# Altium PCB LCDTestor_CPLD.PcbDoc (part 1 of 2)
Units mil, origin at the board's own origin, x right, y up, seen from the top; angles counter-clockwise.
Board outline 5780 x 4745 mil, 2 copper layers (Top Layer, Bottom Layer); 142 components, 172 nets, 608 pads, 189 vias.
Unrouted connection lines stored in the file: 2.
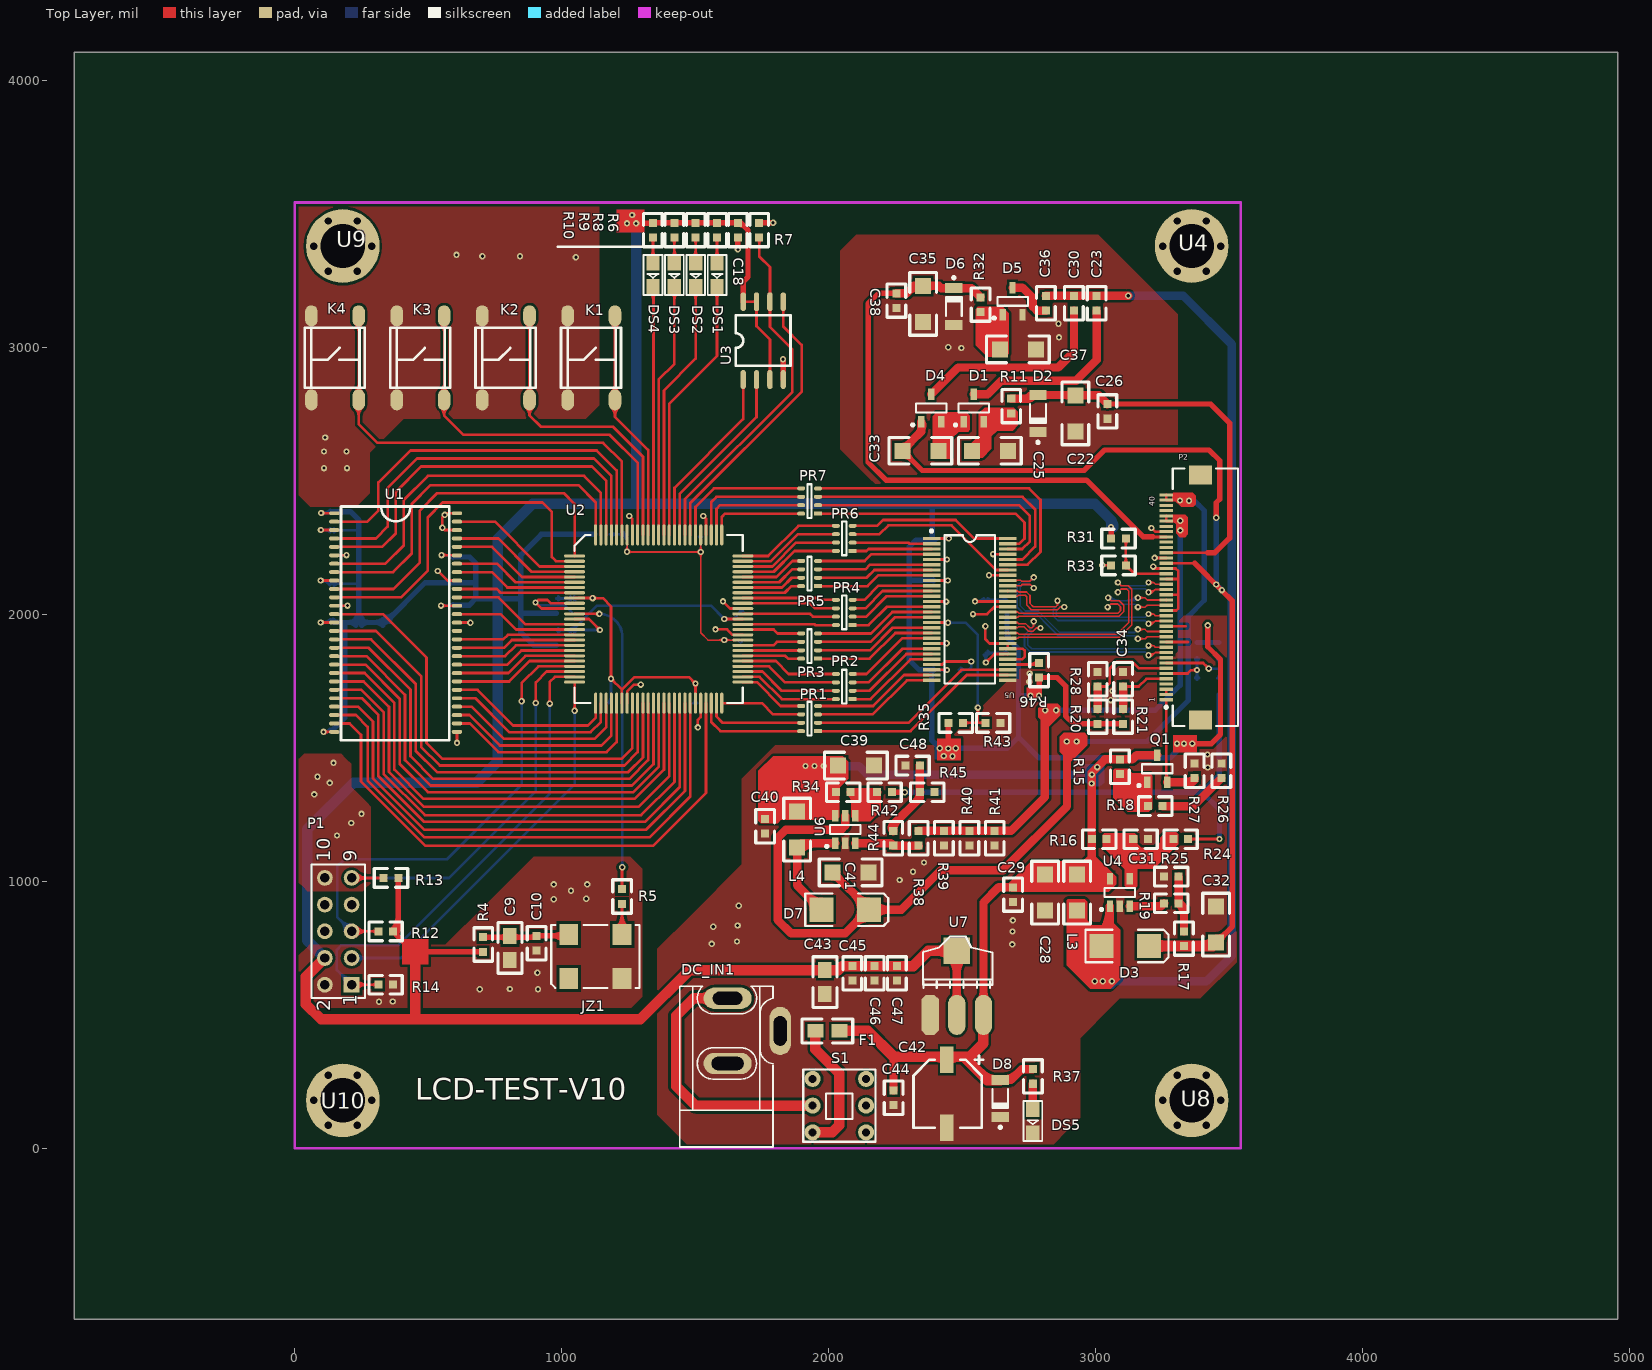
[diagram p0: Top Layer view]
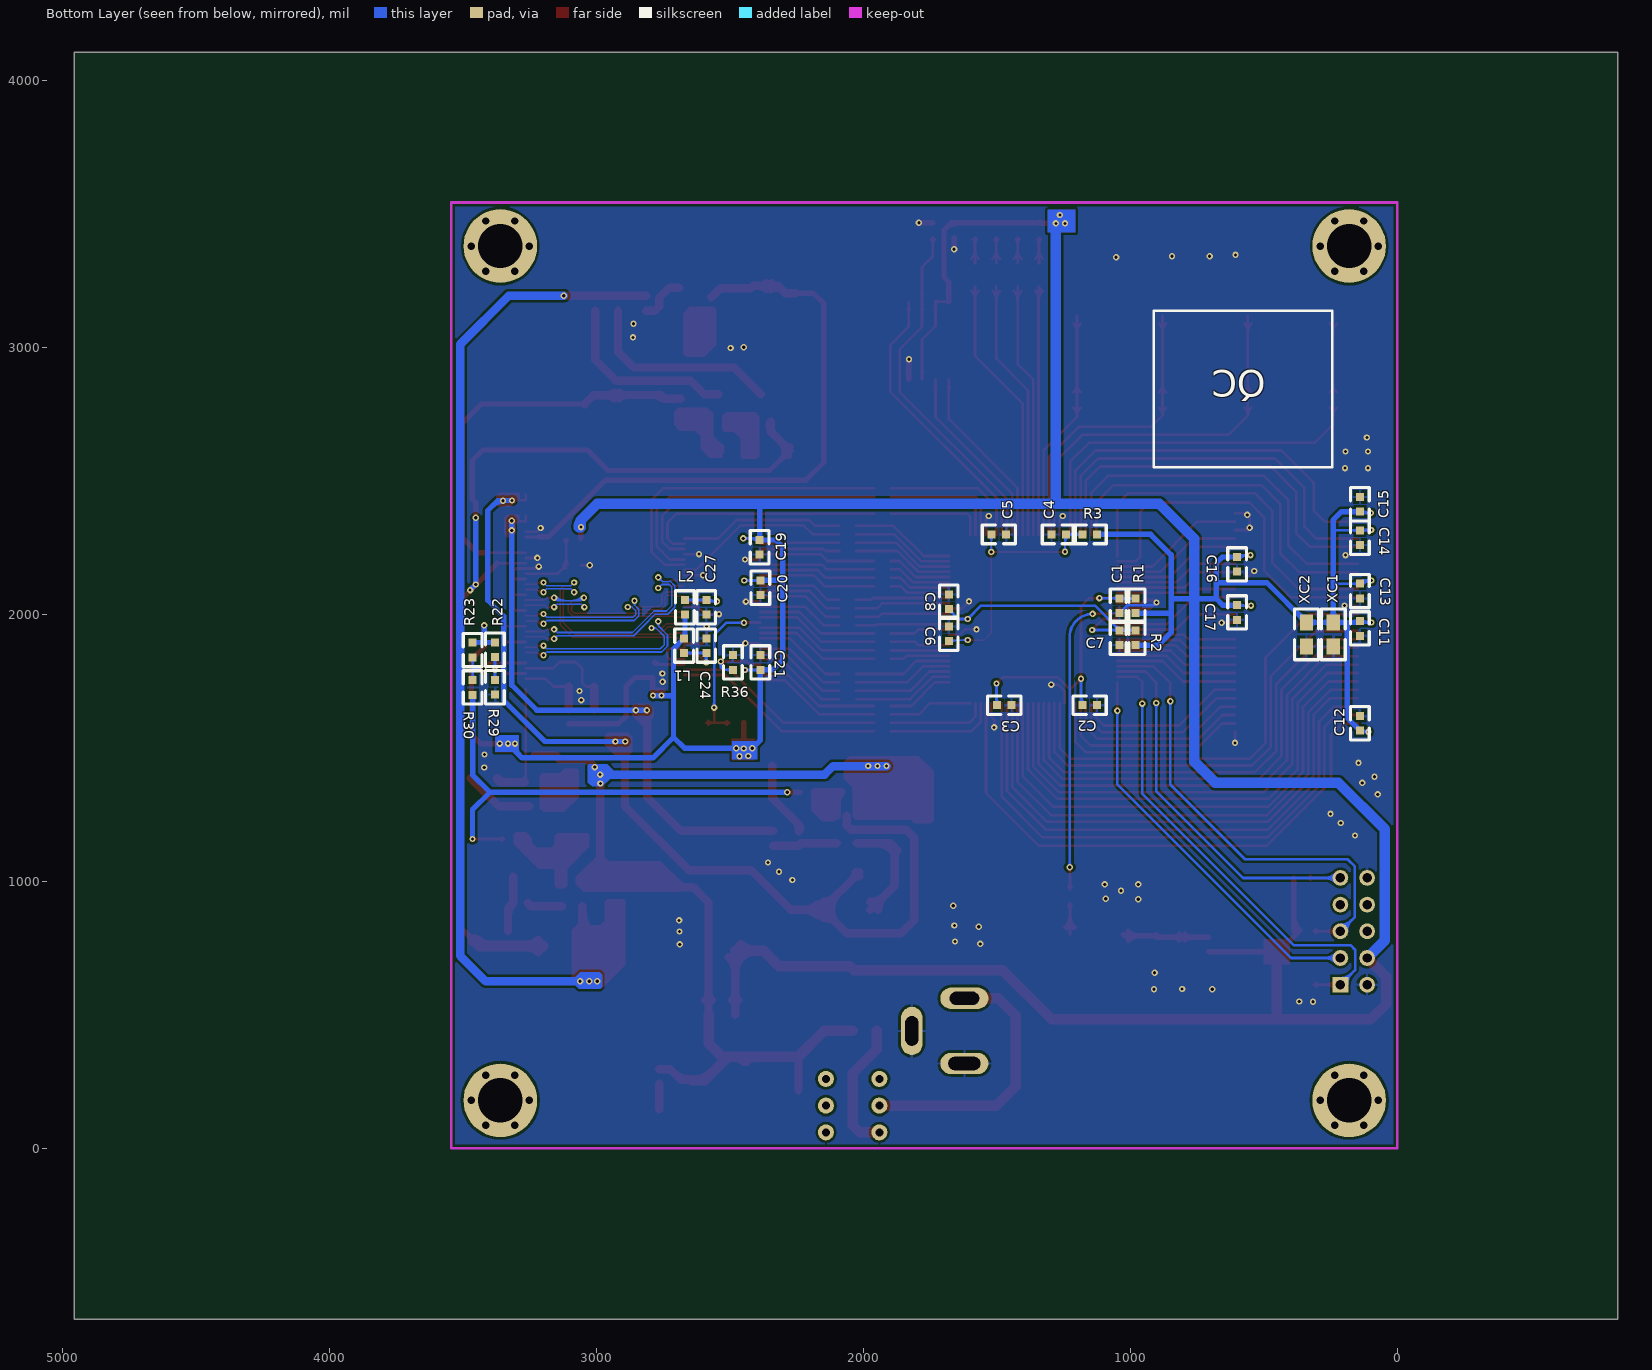
[diagram p1: Bottom Layer view, seen from below]

## Layer stack, top to bottom
Top Layer: signal copper 1.4
Dielectric: dielectric 12.6, FR-4, Dk 4.8
Bottom Layer: signal copper 1.4

## Board outline
-825,4105 -825,-640 1225,-640 4955,-640 4955,960 4955,4105 -825,4105

## Design rules (kind name [scope] priority, off if disabled: settings)
Clearance [All] p1: gap=10
DiffPairsRouting [All] p1: maxlimit=10 minlimit=5.91 mostfreqgap=5.91 maxuncoupledlength=500
PlaneConnect [All] p1: planeconnectstyle=Direct reliefexpansion=20 reliefentries=4 reliefconductorwidth=10 reliefairgap=10
PolygonConnect [All] p1: connectstyle=Direct reliefconductorwidth=10 reliefentries=4 polygonreliefangle="90 Angle"
RoutingVias [All] p1: holewidth=11.81 width=23.62 viastyle="Through Hole" minholewidth=11.81 minwidth=23.62 maxholewidth=28 maxwidth=50
SilkscreenOverComponentPads [All] p1: minsilkscreentomaskgap=10
SolderMaskExpansion [All] p1: expansion=4
Width [All] p1: maxlimit=39.37 minlimit=5.91 preferedwidth=10
25 further rules are at their usual default settings.

## Classes and differential pairs
differential pair RXIN3: +RXIN3_P -RXIN3_N
differential pair RXIN2: +RXIN2_P -RXIN2_N
differential pair RXIN1: +RXIN1_P -RXIN1_N
differential pair RXIN0: +RXIN0_P -RXIN0_N
differential pair RXCLKIN: +RXCLKIN_P -RXCLKIN_N

## Components (designator, comment, footprint, x,y, rotation, side; value= is the part's Value field where it differs from the comment)
C1 "104" 0603 1040,2060 r0 bottom
C2 "104" 0603 1180,1660 r270 bottom
C3 "104" 0603 1500,1660 r270 bottom
C4 "104" 0603 1240,2300 r90 bottom
C5 "104" 0603 1520,2300 r270 bottom
C6 "104" 0603 1680,1900 r180 bottom
C7 "104" 0603 1040,1940 r0 bottom
C8 "104" 0603 1680,2020 r180 bottom
C9 "4.7uF" 0805 806,796 r180 top
C10 "104" 0603 906,796 r180 top
C11 "103" 0603 140,1920 r180 bottom
C12 "103" 0603 140,1620 r0 bottom
C13 "103" 0603 140,2060 r180 bottom
C14 "103" 0603 140,2260 r180 bottom
C15 "103" 0603 140,2440 r0 bottom
C16 "103" 0603 600,2160 r180 bottom
C17 "103" 0603 600,1980 r180 bottom
C18 "103" 0603 1660,3412 r0 top
C19 "104" 0603 2388.39,2279 r0 bottom
C20 "104" 0603 2385.67,2127.27 r0 bottom
C21 "104" 0603 2385.67,1792.62 r180 bottom
C22 "10uF/25V" 1206 2924,2753 r180 top
C23 "104" 0603 3004,3193 r180 top
C24 "104" 0603 2588.39,1855.73 r180 bottom
C25 "10uF/25V" 1206 2604,2613 r270 top
C26 "104" 0603 3044,2733 r0 top
C27 "104" 0603 2588.39,2054 r0 bottom
C28 "10uF/25V" 1206 2811,958 r180 top
C29 "104" 0603 2691,978 r180 top
C30 "104" 0603 2919,3138 r0 top
C31 "104" 0603 3141,1158 r270 top
C32 "2.2uF/25V" 1206 3451,838 r0 top
C33 "10uF/25V" 1206 2344,2613 r90 top
C34 "104" 0603 3103,1730 r0 top
C35 "10uF/25V" 1206 2354,3163 r0 top
C36 "104" 0603 2814,3138 r0 top
C37 "10uF/25V" 1206 2709,2993 r90 top
C38 "104" 0603 2254,3203 r180 top
C39 "10uF/25V" 1206 2102,1434 r270 top
C40 "104" 0603 1762,1234 r180 top
C41 "2.2uF/25V" 1206 2082,1034 r270 top
C42 "Cap Tantalum" SMD06 2443,77 r0 top
C43 "Cap Tantalum" 0805 1986,578 r0 top
C44 "22uF" 0603 2243,217 r180 top
C45 "22uF" 0603 2088.5,683 r180 top
C46 "104" 0603 2172.25,683 r180 top
C47 "104" 0603 2256,683 r180 top
C48 "104" 0603 2342,1434 r90 top
D1 "BAV99" SOT-23-3L 2544,2773 r0 top
D2 "ZMM18" LL-34 2784,2753 r180 top
D3 "MBR0520" DSO-C2/X2.3 3111,758 r0 top
D4 "BAV99" SOT-23-3L 2384,2773 r0 top
D5 "BAV99" SOT-23-3L 2689,3173 r0 top
D6 "ZMM10" LL-34 2469,3153 r0 top
D7 "MBR0520" DSO-C2/X2.3 2062,894 r0 top
D8 "ZMM5V1" LL-34 2643,187 r180 top
DC_IN1 "POWER" DC10B 1720,440 r90 top locked
DS1 "LED1" SMDLED 1582,3272 r0 top
DS2 "LED1" SMDLED 1502,3272 r0 top
DS3 "LED1" SMDLED 1422,3272 r0 top
DS4 "LED1" SMDLED 1342,3272 r0 top
DS5 "LED1" SMDLED 2765,102 r0 top
F1 "Fuse 1" 0805 2040,440 r90 top
JZ1 "50MHz" Q5*7 1026,636 r0 top
K1 "KEY_M" K贴片 1111,2961 r0 top
K2 "KEY_M" K贴片 791,2961 r0 top
K3 "KEY_M" K贴片 471,2961 r0 top
K4 "KEY_M" K贴片 151,2961 r0 top
L1 "Inductor" 0603 2671.1,1910.73 r0 bottom
L2 "Inductor" 0603 2668.39,1999 r180 bottom
L3 "Inductor" 1206 2931,958 r180 top
L4 "Inductor" 1206 1882,1194 r180 top
P1 "Header 5X2" HDR2X5 213,613 r90 top
P2 "MHDR2X20" FH12A-40S-0.5SH 3328.39,2064 r90 top locked (schematic designator P1)
PR1 "20R" 0603_4 1958.39,1564 r90 top
PR2 "20R" 0603_4 2088.39,1684 r90 top
PR3 "20R" 0603_4 1958.39,1835.67 r90 top
PR4 "20R" 0603_4 2088.39,1961.5 r90 top
PR5 "20R" 0603_4 1958.39,2107.33 r90 top
PR6 "20R" 0603_4 2088.39,2239 r90 top
PR7 "20R" 0603_4 1958.39,2379 r90 top
Q1 "2N3904" SOT-23-3L 3231,1422 r0 top
R1 "0" 0603 980,2060 r0 bottom
R2 "0" 0603 980,1940 r0 bottom
R3 "0" 0603 1180,2300 r270 bottom
R4 "20" 0603 706,736 r0 top
R5 "20" 0603 1226,916 r0 top
R6 "510" 0603 1582,3412 r0 top
R7 "10K" 0603 1740,3412 r0 top
R8 "510" 0603 1502,3412 r0 top
R9 "510" 0603 1422,3412 r0 top
R10 "510" 0603 1342,3412 r0 top
R11 "1.5K" 0603 2684,2753 r0 top
R12 "10K" 0603 313,813 r270 top
R13 "10K" 0603 333,1013 r270 top
R14 "10K" 0603 313,613 r270 top
R15 "10K" 0603 3091,1402 r0 top
R16 "10K" 0603 3041,1158 r90 top
R17 "100K  %1" 0603 3331,758 r0 top
R18 "10K" 0603 3251,1282 r90 top
R19 "100K" 0603 3311,918 r90 top
R20 "10K" 0603 3008,1590 r0 top
R21 "10K" 0603 3103,1645 r180 top
R22 "10K" 0603 3380,1840 r180 bottom
R23 "10K" 0603 3463.39,1894 r0 bottom
R24 "0" 0603 3291,1158 r270 top
R25 "12.4K  %1" 0603 3311,1018 r90 top
R26 "10K" 0603 3471,1442 r180 top
R27 "10K" 0603 3371,1442 r180 top
R28 "10K" 0603 3008,1785 r180 top
R29 "10K" 0603 3380,1700 r180 bottom
R30 "0" 0603 3463.39,1754 r0 bottom
R31 "10K" 0603 3113.39,2284 r90 top
R32 "270R" 0603 2569,3133 r0 top
R33 "10K" 0603 3058.39,2184 r270 top
R34 "10K" 0603 2082,1334 r90 top
R35 "10K" 0603 2503.39,1594 r90 top
R36 "20" 0603 2488.39,1792.62 r180 bottom
R37 "1K" 0603 2765,242 r0 top
R38 "10K" 0603 2337,1189 r180 top
R39 "1.1" 0603 2432,1134 r0 top
R40 "1.2" 0603 2527,1134 r0 top
R41 "1.1" 0603 2622,1134 r0 top
R42 "0" 0603 2182,1334 r270 top
R43 "10K" 0603 2643.39,1594 r90 top
R44 "3K" 0603 2242,1134 r0 top
R45 "82K" 0603 2342,1334 r270 top
R46 "4.8K" 0603 2788.39,1819 r180 top
S1 "SW-SPDT" 自锁开关6 2040,160 r270 top locked
U1 "MT48LC16M16A2P" TSSOP54 148.39,2379 r0 top
U2 "EPM240T100I5N" TQFP-100 1048.39,2219 r0 top (schematic designator IC9)
U3 "W25Q32BVIG" 8S2 1680,2880 r90 top (schematic designator IC13)
U4 "Comment" 螺丝孔-4mm 3360,3380 r0 top locked
U4 "MP1541DJ" SOT-23-5L 3091,958 r0 top
U5 "SN75LVDS83B" DGG056 2528.39,2019 r270 top (schematic designator U3)
U6 "MP3202DJ" SOT-23-6L 2062,1194 r0 top
U7 "AMS1117-3.3" AMS1117 2480,620 r0 top
U8 "Comment" 螺丝孔-4mm 3360,180 r0 top locked
U9 "Comment" 螺丝孔-4mm 180,3380 r0 top locked
U10 "Comment" 螺丝孔-4mm 180,180 r0 top locked
XC1 "4.7uF" 0805 240,1880 r180 bottom
XC2 "4.7uF" 0805 340,1880 r180 bottom

## Footprints (in the part's own frame and the unit in brackets; to place one, negate y for a bottom-side part, rotate by r counter-clockwise, add the part's x,y. Pads: shape width x height; smd on the part's side, far side on the other; paste and mask are expansions set on the pad)
8S2 [mm] "AT26DF321"
  oval 1.8x0.508 smd: 1(0,0) 2(0,-1.27) 3(0,-2.54) 4(0,-3.81) 5(7.4,-3.81) 6(7.4,-2.54) 7(7.4,-1.27) 8(7.4,0)
  silkscreen extent 1.3,-4.5 6.1,0.7
0603 [mil]
  rect 30x30 smd: 1(0,55) 2(0,0)
  silkscreen extent -35,-35 35,90
0603_4 [mil]
  rect 15x30 smd: 1(-1.42,-1.73)
  oval 15x30 smd: 2(30.08,-1.73) 3(61.57,-1.73) 4(93.07,-1.73) 5(93.07,61.14) 6(61.57,61.14) 7(30.08,61.14) 8(-1.42,61.26)
  silkscreen extent -17,22 109,38
0805 [mil]
  rect 50x60 smd: 1(0,90) 2(0,0)
  silkscreen extent -45,-50 45,140
1206 [mil]
  rect 60x60 smd: 1(0,-67.5) 2(0,67.5)
  silkscreen extent -50,-118 50,118
AMS1117 [mil] "U?"
  oct 65x150 smd: 1(-100,-120)
  oval 65x150 smd: 2(0,-120) 3(100,-120)
  rect 100x100 smd: 4(0,120)
  silkscreen extent -126,-20 134,173
DC10B [mil] "J?"
  oval 80x180 hole 50 slot 110 at 90 deg: 1(122.05,98.43)
  oval 80x180 hole 50 slot 120 at 90 deg: 2(-122.05,98.43)
  oval 180x80 hole 50 slot 110 at 0 deg: 3(0,-98.43)
  silkscreen extent -435,-72 168,278
DGG056 [mm] "Shrink Small Outline; 56 Leads; Body Width 6.1 mm; Pitch 0.5 mm"
  rect 0.3x1.65 smd: 1(-6.75,-3.625) 2(-6.25,-3.625) 3(-5.75,-3.625) 4(-5.25,-3.625) 5(-4.75,-3.625) 6(-4.25,-3.625) 7(-3.75,-3.625) 8(-3.25,-3.625) 9(-2.75,-3.625) 10(-2.25,-3.625) 11(-1.75,-3.625) 12(-1.25,-3.625) 13(-0.75,-3.625) 14(-0.25,-3.625) 15(0.25,-3.625) 16(0.75,-3.625) 17(1.25,-3.625) 18(1.75,-3.625) 19(2.25,-3.625) 20(2.75,-3.625) 21(3.25,-3.625) 22(3.75,-3.625) 23(4.25,-3.625) 24(4.75,-3.625) 25(5.25,-3.625) 26(5.75,-3.625) 27(6.25,-3.625) 28(6.75,-3.625) 29(6.75,3.625) 30(6.25,3.625) 31(5.75,3.625) 32(5.25,3.625) 33(4.75,3.625) 34(4.25,3.625) 35(3.75,3.625) 36(3.25,3.625) 37(2.75,3.625) 38(2.25,3.625) 39(1.75,3.625) 40(1.25,3.625) 41(0.75,3.625) 42(0.25,3.625) 43(-0.25,3.625) 44(-0.75,3.625) 45(-1.25,3.625) 46(-1.75,3.625) 47(-2.25,3.625) 48(-2.75,3.625) 49(-3.25,3.625) 50(-3.75,3.625) 51(-4.25,3.625) 52(-4.75,3.625) 53(-5.25,3.625) 54(-5.75,3.625) 55(-6.25,3.625) 56(-6.75,3.625)
  silkscreen extent -7.57,-3.75 7.05,2.4
DSO-C2/X2.3 [mm] "DO-214-AA/SMB; 2 C-Bend Leads; Body 5.3 x 3.6 mm, inc. leads (LxW)"
  rect 2.3x2.3 smd: 1(-2.25,0) 2(2.25,0)
  silkscreen extent -3.8,-1.55 4.1,1.55
FH12A-40S-0.5SH [mm] "Connector; FH12 Series; 40 Position; 0.5mm Spaced Top Contact"
  rect 0.3x1.3 smd: 1(-9.75,1.625) 2(-9.25,1.625) 3(-8.75,1.625) 4(-8.25,1.625) 5(-7.75,1.625) 6(-7.25,1.625) 7(-6.75,1.625) 8(-6.25,1.625) 9(-5.75,1.625) 10(-5.25,1.625) 11(-4.75,1.625) 12(-4.25,1.625) 13(-3.75,1.625) 14(-3.25,1.625) 15(-2.75,1.625) 16(-2.25,1.625) 17(-1.75,1.625) 18(-1.25,1.625) 19(-0.75,1.625) 20(-0.25,1.625) 21(0.25,1.625) 22(0.75,1.625) 23(1.25,1.625) 24(1.75,1.625) 25(2.25,1.625) 26(2.75,1.625) 27(3.25,1.625) 28(3.75,1.625) 29(4.25,1.625) 30(4.75,1.625) 31(5.25,1.625) 32(5.75,1.625) 33(6.25,1.625) 34(6.75,1.625) 35(7.25,1.625) 36(7.75,1.625) 37(8.25,1.625) 38(8.75,1.625) 39(9.25,1.625) 40(9.75,1.625)
  rect 1.8x2.2 smd: 41(-11.65,-1.625) 42(11.65,-1.625)
  silkscreen extent -12.25,-5.2 12.25,1.75
HDR2X5 [mm] "Connector; Header; 5x2 Position"
  rect 1.5x1.5 hole 0.9: 1(0,0)
  round 1.5 hole 0.9: 2(0,2.54) 3(2.54,0) 4(2.54,2.54) 5(5.08,0) 6(5.08,2.54) 7(7.62,0) 8(7.62,2.54) 9(10.16,0) 10(10.16,2.54)
  silkscreen extent -1.27,-1.27 11.43,3.81
K贴片 [mm] "S?"
  oval 1.2x2 smd: 1(-2.25,-4) 1(-2.25,4) 2(2.25,-4) 2(2.25,4)
  silkscreen extent -2.89,-2.86 2.83,2.86
LL-34 [mm] "D?"
  rect 1.65x0.95 smd: 1(0,1.75) 2(0,-1.75)
  silkscreen extent -0.75,-0.9 0.75,2.87
Q5*7 [mil] "25MHZ"
  rect 70x80 smd: 1(0,0) 2(200,0) 3(200,165) 4(0,165)
  silkscreen extent -65,-35 265,200
SMD06 [mil]
  rect 50x100 smd: 1(0,255) 2(0,0)
  silkscreen extent -125,0 135,270
SMDLED [mm] "D?"
  rect 1.27x1.4 smd: 1(0,1.105) 2(0,-1.105)
  silkscreen extent -0.89,-1.91 0.89,1.91
SOT-23-3L [mm] "D?"
  rect 0.6x1.1 smd: 1(-0.95,-1.3) 2(0.95,-1.3) 3(0,1.3)
  silkscreen extent -1.87,-1.72 1.45,0.43
SOT-23-5L [mm] "U?"
  rect 0.6x1.1 smd: 1(-0.95,-1.3) 2(0,-1.3) 3(0.95,-1.3) 4(0.95,1.3) 5(-0.95,1.3)
  silkscreen extent -1.87,-1.72 1.45,0.43
SOT-23-6L [mm] "U?"
  rect 0.6x1.1 smd: 1(-0.95,-1.3) 2(0,-1.3) 3(0.95,-1.3) 4(0.95,1.3) 5(0,1.3) 6(-0.95,1.3)
  silkscreen extent -1.87,-1.72 1.45,0.43
TQFP-100 [mm]
  oval 2x0.29 smd: 1(0,0) 2(0,-0.5) 3(0,-1) 4(0,-1.5) 5(0,-2) 6(0,-2.5) 7(0,-3) 8(0,-3.5) 9(0,-4) 10(0,-4.5) 11(0,-5) 12(0,-5.5) 13(0,-6) 14(0,-6.5) 15(0,-7) 16(0,-7.5) 17(0,-8) 18(0,-8.5) 19(0,-9) 20(0,-9.5) 21(0,-10) 22(0,-10.5) 23(0,-11) 24(0,-11.5) 25(0,-12) 51(16,-12) 52(16,-11.5) 53(16,-11) 54(16,-10.5) 55(16,-10) 56(16,-9.5) 57(16,-9) 58(16,-8.5) 59(16,-8) 60(16,-7.5) 61(16,-7) 62(16,-6.5) 63(16,-6) 64(16,-5.5) 65(16,-5) 66(16,-4.5) 67(16,-4) 68(16,-3.5) 69(16,-3) 70(16,-2.5) 71(16,-2) 72(16,-1.5) 73(16,-1) 74(16,-0.5) 75(16,0)
  oval 0.29x2 smd: 26(2,-14) 27(2.5,-14) 28(3,-14) 29(3.5,-14) 30(4,-14) 31(4.5,-14) 32(5,-14) 33(5.5,-14) 34(6,-14) 35(6.5,-14) 36(7,-14) 37(7.5,-14) 38(8,-14) 39(8.5,-14) 40(9,-14) 41(9.5,-14) 42(10,-14) 43(10.5,-14) 44(11,-14) 45(11.5,-14) 46(12,-14) 47(12.5,-14) 48(13,-14) 49(13.5,-14) 50(14,-14) 76(14,2) 77(13.5,2) 78(13,2) 79(12.5,2) 80(12,2) 81(11.5,2) 82(11,2) 83(10.5,2) 84(10,2) 85(9.5,2) 86(9,2) 87(8.5,2) 88(8,2) 89(7.5,2) 90(7,2) 91(6.5,2) 92(6,2) 93(5.5,2) 94(5,2) 95(4.5,2) 96(4,2) 97(3.5,2) 98(3,2) 99(2.5,2) 100(2,2)
  silkscreen extent 0,-14 16,2
TSSOP54 [mm] "U?"
  oval 1x0.375 smd: 1(0,0) 2(0,-0.8) 3(0,-1.6) 4(0,-2.4) 5(0,-3.2) 6(0,-4) 7(0,-4.8) 8(0,-5.6) 9(0,-6.4) 10(0,-7.2) 11(0,-8) 12(0,-8.8) 13(0,-9.6) 14(0,-10.4) 15(0,-11.2) 16(0,-12) 17(0,-12.8) 18(0,-13.6) 19(0,-14.4) 20(0,-15.2) 21(0,-16) 22(0,-16.8) 23(0,-17.6) 24(0,-18.4) 25(0,-19.2) 26(0,-20) 27(0,-20.8) 28(11.67,-20.8) 29(11.67,-20) 30(11.67,-19.2) 31(11.67,-18.4) 32(11.67,-17.6) 33(11.67,-16.8) 34(11.67,-16) 35(11.67,-15.2) 36(11.67,-14.4) 37(11.67,-13.6) 38(11.67,-12.8) 39(11.67,-12) 40(11.67,-11.2) 41(11.67,-10.4) 42(11.67,-9.6) 43(11.67,-8.8) 44(11.67,-8) 45(11.67,-7.2) 46(11.67,-6.4) 47(11.67,-5.6) 48(11.67,-4.8) 49(11.67,-4) 50(11.67,-3.2) 51(11.67,-2.4) 52(11.67,-1.6) 53(11.67,-0.8) 54(11.67,0)
  silkscreen extent 0.64,-21.59 10.92,0.64
自锁开关6 [mil] "J?"
  round 60 hole 30: 1(-100,-100) 2(0,-100) 3(100,-100) 4(100,100) 5(0,100) 6(-100,100)
  silkscreen extent -135,-135 135,135
螺丝孔-4mm [mm]
  round 7 hole 4.2: 1(0,0)

## Part data
C1 C2 C3 C4 C5 C6 C7 C8 C9 C10 C19 C20 C21 C22 C23 C24 C25 C26 C27 C28 C29 C30 C31 C32 C33 C34 C35 C36 C37 C38 C39 C40 C41 C48: library part C
C11 C12 C13 C14 C15 C16 C17 C18 XC1 XC2: library part CAP, "Capacitor"
C42 C43: "Polarized Capacitor (Surface Mount)"
C44 C45 C46 C47: library part C_2
D2 D6 D8: library part "D Zener", "Zener Diode"
D3 D7: library part "D Schottky", "Schottky Diode"
DC_IN1: library part POW
DS1 DS2 DS3 DS4 DS5: library part LED2, "Typical RED, GREEN, YELLOW, AMBER GaAs LED"
F1: "Fuse"
JZ1: library part JZ-4P, "4脚晶振"
P1: "Header, 5-Pin, Dual row"
P2: "Header, 20-Pin, Dual row"
PR1 PR2 PR3 PR4 PR5 PR6 PR7: library part PR-4
Q1: "NPN General Purpose Amplifier"
R1 R2 R3 R4 R5 R6 R7 R8 R9 R10 R11 R12 R13 R14 R15 R16 R17 R18 R19 R20 R21 R22 R23 R24 R25 R26 R27 R28 R29 R30 R31 R32 R33 R34 R35 R36 R37 R38 R39 R40 R41 R42 R43 R44 R45 R46: library part R
S1: "SPDT Subminiature Toggle Switch, Right Angle Mounting, Vertical Actuation"
U2: "MAX II 3.3/2.5V CPLD, 80 IOs, 240 Logic Elements, 100-Pin Plastic TQFP, Industrial Temperature, Speed Grade 5, Pb-Free"
U4: library part MP1541
U6: library part MP3202
U7: library part AMS1117

## Via types
v1: diameter 23.62, hole 11.81, Top Layer to Bottom Layer, 165 vias
v2: diameter 50, hole 28, Top Layer to Bottom Layer, 24 vias

## Nets (pads, with @x,y where several pads share a name; then routed paths per layer and width w, separated by ;. In a path a pad name is that pad's centre, name@x,y a point inside that pad or via, vN(x,y) a via of type N, cw(c..) or ccw(c..) an arc to the next point about the centre after c; other vN are vias at no path point)
AVDD: C32.1 C33.2 D3.2 D4.1 P2.27 R17.2 | length 4173.9
  Top Layer w10: P2.27@3264.41,2191.95 3370.95,2191.95
  Top Layer w20: C33.2@2276.5,2593 cw(c2276.5,2544.72) 2310.64,2578.86 cw(c2344.78,2613) C33.2@2296.5,2613 ; C33.2@2276.5,2613 2350.5,2539 2957,2539 3034,2616 3425,2616 3465,2576 3465,2432 3452,2419 v1(3452,2362) ; 3370.95,2191.95 v1@3472.45,2090.45 ; C32.1@3451,770.5 3512,831.5 3512,2050.9 v1@3472.45,2090.45 ; C32.1@3451,790.5 ccw(c3451,838.78) 3485.14,804.64 ccw(c3519.28,770.5) C32.1@3471,770.5 ; v1(3473,2091) v1@3472.45,2090.45
  Top Layer w31.5: C33.2@2276.5,2613 2276.5,2614.5 2346.6,2684.6 D4.1@2346.6,2721.82 ; C33.2@2276.5,2627.25 ccw(c2276.5,2658.04) C33.2@2298.27,2636.27 ; C33.2@2290.75,2613 cw(c2328.78,2613) C33.2@2301.89,2639.89 ; 2333.96,2671.96 ccw(c2293.94,2711.98) D4.1@2350.54,2711.98
  Top Layer w39.37: D3.2@3199.58,758 R17.2@3331,758 3438.5,758 C32.1@3451,770.5 ; D3.2@3217.68,739.9 cw(c3261.36,696.22) 3261.36,758 cw(c3261.36,819.78) D3.2@3217.68,776.1 ; 3395.92,758 ccw(c3395.92,825.58) C32.1@3443.71,777.79
  Bottom Layer w20: v1(3452,2362) v1(3452,2112) v1(3473,2091)
B0: PR3.5 U2.61 | length 225
  Top Layer w10: U2.61@1678.31,1943.41 1793.98,1943.41 1808.65,1928.74 PR3.5@1897.24,1928.74
B1: PR3.8 U2.56 | length 223.3
  Top Layer w10: U2.56@1678.31,1844.98 1837.4,1844.98 1848.14,1834.25 PR3.8@1897.13,1834.25
B2: PR2.5 U2.55 | length 368.9
  Top Layer w10: U2.55@1678.31,1825.3 1802.09,1825.3 1850.32,1777.07 PR2.5@2027.24,1777.07
B3: PR2.6 U2.54 | length 373.8
  Top Layer w10: U2.54@1678.31,1805.61 1776.77,1805.61 1836.81,1745.57 PR2.6@2027.24,1745.57
B4: PR2.7 U2.53 | length 378.7
  Top Layer w10: U2.53@1678.31,1785.93 1751.46,1785.93 1823.31,1714.08 PR2.7@2027.24,1714.08
B5: PR2.8 U2.52 | length 383.5
  Top Layer w10: U2.52@1678.31,1766.24 1741.14,1766.24 1824.8,1682.58 PR2.8@2027.13,1682.58
B6: PR3.6 U2.58 | length 224.3
  Top Layer w10: U2.58@1678.31,1884.35 1793.74,1884.35 1806.63,1897.24 PR3.6@1897.24,1897.24
B7: PR3.7 U2.57 | length 227
  Top Layer w10: U2.57@1678.31,1864.67 1896.17,1864.67 PR3.7@1897.24,1865.75 ; 1881.11,1864.67 ccw(c1881.11,1874.38) PR3.7@1887.98,1867.51
B_0: PR3.4 U5.15 | length 458.9
  Top Layer w10: PR3.4@1960.12,1928.74 2158.12,1928.74 2238.54,2009.16 U5.15@2385.67,2009.16
B_1: PR3.1 U5.19 | length 465.4
  Top Layer w10: PR3.1@1960.12,1834.25 2153.64,1834.25 2249.8,1930.42 U5.19@2385.67,1930.42
B_2: PR2.4 U5.20 | length 350.9
  Top Layer w10: PR2.4@2090.12,1777.07 2141.46,1777.07 2275.12,1910.73 U5.20@2385.67,1910.73
B_3: PR2.3 U5.22 | length 347.7
  Top Layer w10: PR2.3@2090.12,1745.57 2149.96,1745.57 2275.75,1871.36 U5.22@2385.67,1871.36
B_4: PR2.2 U5.23 | length 352.5
  Top Layer w10: PR2.2@2090.12,1714.08 2153.46,1714.08 2291.06,1851.68 U5.23@2385.67,1851.68
B_5: PR2.1 U5.24 | length 357.4
  Top Layer w10: PR2.1@2090.12,1682.58 2156.97,1682.58 2306.38,1831.99 U5.24@2385.67,1831.99
B_6: PR3.3 U5.16 | length 463.8
  Top Layer w10: PR3.3@1960.12,1897.24 2156.63,1897.24 2248.86,1989.47 U5.16@2385.67,1989.47
B_7: PR3.2 U5.18 | length 460.5
  Top Layer w10: PR3.2@1960.12,1865.75 2155.13,1865.75 2239.49,1950.1 U5.18@2385.67,1950.1
BL_DIM: R45.1
BL_EN: R24.1 R30.1 R42.1 | length 1937.8
  Top Layer w10: R24.1@3346,1158 3347,1159 v1(3464,1159) ; R24.1@3353.07,1150.93 cw(c3372.56,1131.44) 3372.56,1159 ; R24.1@3353.07,1165.07 ccw(c3367.73,1179.73) 3367.73,1159 ; v1@3459.18,1154.18 ccw(c3447.56,1142.56) 3447.56,1159 ccw(c3447.56,1175.44) v1@3459.18,1163.82
  Top Layer w20: R42.1@2237,1334 v1(2285,1334)
  Bottom Layer w20: v1(2285,1334) 3399,1334 ; R30.1@3463.39,1699 3463.39,1398.39 3399,1334 ; v1(3464,1159) 3464,1269 3399,1334
CLK: PR1.8 U2.48 | length 421.9
  Top Layer w10: U2.48@1560.2,1667.82 1560.2,1597.19 1594.8,1562.58 PR1.8@1897.13,1562.58
DM_A0: U1.23 U2.42 | length 1988.4
  Top Layer w10: U1.23@148.39,1686.09 251.3,1686.09 313.39,1624 313.39,1393.85 483.31,1223.93 1313.31,1223.93 1442.09,1352.7 U2.42@1442.09,1667.82
DM_A1: U1.24 U2.43 | length 2018.1
  Top Layer w10: U1.24@148.39,1654.59 237.8,1654.59 293.39,1599 293.39,1385.57 484.95,1194 1316.77,1194 1461.77,1339 U2.43@1461.77,1667.82
DM_A2: U1.25 U2.44 | length 2054.2
  Top Layer w10: U1.25@148.39,1623.09 229.29,1623.09 273.39,1579 273.39,1377.28 485.03,1165.64 1330.03,1165.64 1481.46,1317.07 U2.44@1481.46,1667.82
DM_A3: U1.26 U2.47 | length 2102.5
  Top Layer w10: U1.26@148.39,1591.6 205.79,1591.6 248.39,1549 248.39,1374 488.39,1134 1343.39,1134 1540.51,1331.13 U2.47@1540.51,1667.82
DM_A4: U1.29 U2.30 | length 804.5
  Top Layer w10: U1.29@607.83,1591.6 655.79,1591.6 763.39,1484 1168.39,1484 1205.87,1521.48 U2.30@1205.87,1667.82
DM_A5: U1.30 U2.29 | length 762.3
  Top Layer w10: U1.30@607.83,1623.09 654.29,1623.09 768.39,1509 1148.39,1509 1186.18,1546.8 U2.29@1186.18,1667.82
DM_A6: U1.31 U2.28 | length 717.2
  Top Layer w10: U1.31@607.83,1654.59 662.8,1654.59 783.39,1534 1123.39,1534 1166.5,1577.11 U2.28@1166.5,1667.82
DM_A7: U1.32 U2.27 | length 677.9
  Top Layer w10: U1.32@607.83,1686.09 676.3,1686.09 803.39,1559 1108.39,1559 1146.81,1597.43 U2.27@1146.81,1667.82
DM_A8: U1.33 U2.26 | length 641.6
  Top Layer w10: U1.33@607.83,1717.58 684.8,1717.58 818.39,1584 1098.39,1584 1127.13,1612.74 U2.26@1127.13,1667.82
DM_A9: U1.34 U2.21 | length 472.1
  Top Layer w10: U1.34@607.83,1749.08 803.46,1749.08 879.68,1825.3 U2.21@1048.39,1825.3
DM_A10: U1.22 U2.41 | length 1950.9
  Top Layer w10: U1.22@148.39,1717.58 249.8,1717.58 333.39,1634 333.39,1402.14 487.45,1248.07 1297.45,1248.07 1422.4,1373.02 U2.41@1422.4,1667.82
DM_A11: U1.35 U2.20 | length 467.2
  Top Layer w10: U1.35@607.83,1780.57 799.96,1780.57 864.37,1844.98 U2.20@1048.39,1844.98
DM_A12: U1.36 U2.19 | length 462.3
  Top Layer w10: U1.36@607.83,1812.07 796.46,1812.07 849.06,1864.67 U2.19@1048.39,1864.67
DM_BA0: U1.20 U2.39 | length 1871.2
  Top Layer w10: U1.20@148.39,1780.57 261.81,1780.57 373.39,1669 373.39,1418.71 483.09,1309 1273.39,1309 1383.03,1418.65 U2.39@1383.03,1667.82
DM_BA1: U1.21 U2.40 | length 1913.6
  Top Layer w10: U1.21@148.39,1749.08 258.31,1749.08 353.39,1654 353.39,1410.42 484.81,1279 1288.39,1279 1402.72,1393.33 U2.40@1402.72,1667.82
DM_CAS: U1.17 U2.36 | length 1768.3
  Top Layer w10: U1.17@148.39,1875.06 277.32,1875.06 433.39,1719 433.39,1469 518.39,1384 1253.98,1384 1323.98,1454 U2.36@1323.98,1667.82
DM_CKE: U1.37 U2.18 | length 457.4
  Top Layer w10: U1.37@607.83,1843.57 787.95,1843.57 828.74,1884.35 U2.18@1048.39,1884.35
DM_CLK: U1.38 U2.17 | length 452.6
  Top Layer w10: U1.38@607.83,1875.06 784.45,1875.06 813.43,1904.04 U2.17@1048.39,1904.04
DM_CS: U1.19 U2.38 | length 1834.7
  Top Layer w10: U1.19@148.39,1812.07 265.32,1812.07 393.39,1684 393.39,1439 498.39,1334 1268.39,1334 1363.35,1428.96 U2.38@1363.35,1667.82
DM_D0: U1.2 U2.96 | length 1501.7
  Top Layer w10: U1.2@148.39,2347.5 271.89,2347.5 313.39,2389 313.39,2494 433.39,2614 1130.87,2614 1205.87,2539 U2.96@1205.87,2297.74
DM_D1: U1.4 U2.97 | length 1495
  Top Layer w10: U1.4@148.39,2284.51 303.9,2284.51 348.39,2329 348.39,2474 458.39,2584 1121.18,2584 1186.18,2519 U2.97@1186.18,2297.74
DM_D2: U1.5 U2.98 | length 1458.7
  Top Layer w10: U1.5@148.39,2253.02 327.4,2253.02 378.39,2304 378.39,2459 473.39,2554 1113.39,2554 1166.5,2500.89 U2.98@1166.5,2297.74
DM_D3: U1.7 U2.99 | length 1418.4
  Top Layer w10: U1.7@148.39,2190.02 339.41,2190.02 408.39,2259 408.39,2429 498.39,2519 1083.39,2519 1146.81,2455.57 U2.99@1146.81,2297.74
DM_D4: U1.8 U2.100 | length 1370.8
  Top Layer w10: U1.8@148.39,2158.53 367.91,2158.53 438.39,2229 438.39,2414 508.39,2484 1063.39,2484 1127.13,2420.26 U2.100@1127.13,2297.74
DM_D5: U1.10 U2.1 | length 1374.3
  Top Layer w10: U1.10@148.39,2095.54 369.92,2095.54 468.39,2194 468.39,2389 533.39,2454 1008.39,2454 1048.39,2414 1048.39,2389 U2.1@1048.39,2219
DM_D6: U1.11 U2.2 | length 1354.6
  Top Layer w10: U1.11@148.39,2064.04 398.43,2064.04 498.39,2164 498.39,2364 553.39,2419 928.39,2419 963.39,2384 963.39,2214.32 978.39,2199.32 U2.2@1048.39,2199.32
DM_D7: U1.13 U2.33 | length 1713.9
  Top Layer w10: U1.13@148.39,2001.05 331.34,2001.05 493.39,1839 493.39,1519 553.39,1459 1224.92,1459 1264.92,1499 U2.33@1264.92,1667.82
DM_D8: U1.42 U2.15 | length 464.4
  Top Layer w10: U1.42@607.83,2001.05 771.34,2001.05 828.98,1943.41 U2.15@1048.39,1943.41
DM_D9: U1.44 U2.14 | length 482.4
  Top Layer w10: U1.44@607.83,2064.04 763.35,2064.04 864.29,1963.09 U2.14@1048.39,1963.09
DM_D10: U1.45 U2.8 | length 446.5
  Top Layer w10: U1.45@607.83,2095.54 756.85,2095.54 771.18,2081.2 U2.8@1048.39,2081.2
DM_D11: U1.47 U2.7 | length 464.4
  Top Layer w10: U1.47@607.83,2158.53 738.86,2158.53 796.5,2100.89 U2.7@1048.39,2100.89
DM_D12: U1.48 U2.6 | length 469.3
  Top Layer w10: U1.48@607.83,2190.02 757.36,2190.02 826.81,2120.57 U2.6@1048.39,2120.57
DM_D13: U1.50 U2.5 | length 487.3
  Top Layer w10: U1.50@607.83,2253.02 739.37,2253.02 852.13,2140.26 U2.5@1048.39,2140.26
DM_D14: U1.51 U2.4 | length 492.1
  Top Layer w10: U1.51@607.83,2284.51 762.87,2284.51 887.44,2159.94 U2.4@1048.39,2159.94
DM_D15: U1.53 U2.3 | length 510.1
  Top Layer w10: U1.53@607.83,2347.5 749.88,2347.5 917.76,2179.63 U2.3@1048.39,2179.63
DM_LDQM: U1.15 U2.34 | length 1704.8
  Top Layer w10: U1.15@148.39,1938.06 304.33,1938.06 473.39,1769 473.39,1504 543.39,1434 1234.61,1434 1284.61,1484 U2.34@1284.61,1667.82
DM_RAS: U1.18 U2.37 | length 1801.3
  Top Layer w10: U1.18@148.39,1843.57 268.82,1843.57 413.39,1699 413.39,1454 508.39,1359 1263.39,1359 1343.66,1439.28 U2.37@1343.66,1667.82
DM_UDQM: U1.39 U2.16 | length 447.7
  Top Layer w10: U1.39@607.83,1906.56 780.94,1906.56 798.11,1923.72 U2.16@1048.39,1923.72
DM_WE: U1.16 U2.35 | length 1735
  Top Layer w10: U1.16@148.39,1906.56 285.83,1906.56 453.39,1739 453.39,1489 533.39,1409 1249.29,1409 1304.29,1464 U2.35@1304.29,1667.82
ENABLE: PR1.7 U2.49 | length 377.4
  Top Layer w10: U2.49@1579.88,1667.82 1579.88,1617.5 1603.31,1594.08 PR1.7@1897.24,1594.08
FLS_CLK: R7.2 U2.83 U3.6 | length 1408.1
  Top Layer w10: U2.83@1461.77,2297.74 1461.77,2431.77 1864,2834 1864,2993 1780,3077 U3.6@1780,3171.34 1780,3301 1740,3341 R7.2@1740,3412 ; R7.2@1732.93,3404.93 cw(c1715.86,3387.86) 1740,3387.86 cw(c1764.14,3387.86) R7.2@1747.07,3404.93 ; U3.6@1776.46,3142.37 cw(c1767.93,3133.83) 1780,3133.83 cw(c1792.07,3133.83) U3.6@1783.54,3142.37 ; U3.6@1776.46,3200.31 ccw(c1767.93,3208.84) 1780,3208.84 ccw(c1792.07,3208.84) U3.6@1783.54,3200.31
FLS_CS: U2.85 U3.1 | length 707.9
  Top Layer w10: U2.85@1422.4,2297.74 1422.4,2474.4 1680,2732 U3.1@1680,2880 ; U3.1@1676.46,2851.03 cw(c1667.93,2842.5) 1680,2842.5 cw(c1692.07,2842.5) U3.1@1683.54,2851.03
FLS_DI: U2.82 U3.5 | length 1094.1
  Top Layer w10: U2.82@1481.46,2297.74 1481.46,2416.46 1899,2834 1899,3010 1830,3079 U3.5@1830,3171.34 ; U3.5@1826.46,3142.37 cw(c1817.93,3133.83) 1830,3133.83 cw(c1842.07,3133.83) U3.5@1833.54,3142.37
FLS_DO: U2.84 U3.2 | length 720.5
  Top Layer w10: U2.84@1442.09,2297.74 1442.09,2451.09 1730,2739 U3.2@1730,2880 ; U3.2@1726.46,2851.03 cw(c1717.93,2842.5) 1730,2842.5 cw(c1742.07,2842.5) U3.2@1733.54,2851.03
G0: PR5.5 U2.71 | length 243.8
  Top Layer w10: U2.71@1678.31,2140.26 1804.65,2140.26 1864.79,2200.4 PR5.5@1897.24,2200.4
G1: PR5.6 U2.70 | length 239
  Top Layer w10: U2.70@1678.31,2120.57 1814.96,2120.57 1863.29,2168.91 PR5.6@1897.24,2168.91
G2: PR5.7 U2.69 | length 234.1
  Top Layer w10: U2.69@1678.31,2100.89 1825.28,2100.89 1861.8,2137.41 PR5.7@1897.24,2137.41
G3: PR4.6 U2.66 | length 356.7
  Top Layer w10: U2.66@1678.31,2041.83 1930.55,2041.83 1949.31,2023.07 PR4.6@2027.24,2023.07
G4: PR4.7 U2.64 | length 353.4
  Top Layer w10: U2.64@1678.31,2002.46 1929.92,2002.46 1940.81,1991.58 PR4.7@2027.24,1991.58
G5: PR4.8 U2.62 | length 350.1
  Top Layer w10: U2.62@1678.31,1963.09 1947.48,1963.09 1950.49,1960.08 PR4.8@2027.13,1960.08
G6: PR5.8 U2.68 | length 229.1
  Top Layer w10: U2.68@1678.31,2081.2 1835.59,2081.2 1860.3,2105.92 PR5.8@1897.13,2105.92
G7: PR4.5 U2.67 | length 351.8
  Top Layer w10: U2.67@1678.31,2061.52 1965.87,2061.52 1972.82,2054.57 PR4.5@2027.24,2054.57
G_0: PR5.4 U5.4 | length 436
  Top Layer w10: PR5.4@1960.12,2200.4 2134.79,2200.4 2160.08,2225.69 U5.4@2385.67,2225.69
G_1: PR5.3 U5.6 | length 432.8
  Top Layer w10: PR5.3@1960.12,2168.91 2138.29,2168.91 2155.71,2186.32 U5.6@2385.67,2186.32
G_2: PR5.2 U5.7 | length 437.7
  Top Layer w10: PR5.2@1960.12,2137.41 2141.8,2137.41 2171.02,2166.64 U5.7@2385.67,2166.64
G_3: PR4.3 U5.11 | length 322.4
  Top Layer w10: PR4.3@2090.12,2023.07 2137.46,2023.07 2202.28,2087.9 U5.11@2385.67,2087.9
G_4: PR4.2 U5.12 | length 327.3
  Top Layer w10: PR4.2@2090.12,1991.58 2140.96,1991.58 2217.6,2068.21 U5.12@2385.67,2068.21
G_5: PR4.1 U5.14 | length 324
  Top Layer w10: PR4.1@2090.12,1960.08 2149.47,1960.08 2218.23,2028.84 U5.14@2385.67,2028.84
G_6: PR5.1 U5.8 | length 442.5
  Top Layer w10: PR5.1@1960.12,2105.92 2145.3,2105.92 2186.34,2146.95 U5.8@2385.67,2146.95
G_7: PR4.4 U5.10 | length 317.5
  Top Layer w10: PR4.4@2090.12,2054.57 2133.96,2054.57 2186.97,2107.58 U5.10@2385.67,2107.58
GCLK: R5.1 U2.12 | length 1491.7
  Top Layer w10: 1114.54,2002.46 U2.12@1048.39,2002.46 1140.54,2002.46 v1(1141,2002) ; 1123.44,2002.46 cw(c1123.44,1984.44) v1@1136.18,1997.18 ; 1125.68,2002.46 ccw(c1125.68,2017.32) v1@1136.18,2006.82 ; R5.1@1218.93,978.07 ccw(c1201.86,995.14) 1226,995.14 ccw(c1250.14,995.14) R5.1@1233.07,978.07 ; v1@1222.18,1048.18 cw(c1212.97,1038.97) 1226,1038.97 ; R5.1@1226,971 v1@1226,1052 ; 1226,1034.14 cw(c1245.86,1034.14) v1@1231.82,1048.18 ; v1@1226,1052 cw(c1227,1052) v1(1227,1053) ccw(c1227,1052) v1@1226,1052
  Bottom Layer w10: v1@1222.18,1057.82 ccw(c1210.56,1069.44) 1227,1069.44 ccw(c1243.44,1069.44) v1@1231.82,1057.82 ; v1(1227,1053) 1227,1916 ; 1227,1916 ccw(c1141,1916) v1(1141,2002) cw(c1141,1916) 1227,1916
GND: C1.1 C2.1 C3.1 C4.1 C5.1 C6.1 C7.1 C8.1 C9.1 C10.1 C11.2 C12.2 C13.2 C14.2 C15.2 C16.2 C17.2 C18.2 C19.1 C20.1 C21.1 C22.2 C24.1 C25.2 C26.2 C27.1 C28.2 C29.1 C31.1 C32.2 C34.1 C35.1 C37.1 C38.1 C39.2 C40.1 C41.2 C42.2 C43.2 C44.1 C45.1 C46.1 C47.1 C48.1 D2.1 D5.2 D6.2 D8.1 DC_IN1.2 DC_IN1.3 DS5.2 JZ1.2 K1.1 K2.1 K3.1 K4.1 P1.2 P1.10 P2.9 P2.12 P2.15 P2.18 P2.21 P2.24 P2.26 P2.28 P2.33 R7.1 R14.1 R25.1 R26.2 R27.2 R28.2 R29.2 R33.2 R36.1 R39.2 R40.2 R41.2 R43.2 U1.6 U1.12 U1.28 U1.41 U1.46 U1.52 U1.54 U2.10 U2.11 U2.32 U2.46 U2.60 U2.65 U2.79 U2.93 U3.4 U4.2 U5.5 U5.13 U5.21 U5.29 U5.33 U5.35 U5.36 U5.43 U5.49 U5.53 U6.2 U7.1 XC1.2 XC2.2 | length 3027.4
  Top Layer w10: U1.12@148.39,2032.54 197.54,2032.54 v1(198,2033) ; U1.6@148.39,2221.52 193.52,2221.52 v1(194,2222) ; v1(536,2163) 571.97,2127.03 U1.46@607.83,2127.03 ; U1.28@607.83,1560.1 607.83,1519.17 v1(608,1519) ; U1.41@607.83,1969.55 657.45,1969.55 v1(658,1969) ; U1.52@607.83,2316.01 561.99,2316.01 v1(553,2325) 553,2363 569,2379 U1.54@607.83,2379 ; v1(902,2045) 924.85,2022.15 U2.11@1048.39,2022.15 ; 911,2054 947,2054 959.17,2041.83 U2.10@1048.39,2041.83 ; U2.32@1245.24,1667.82 1245.24,1711.24 1271,1737 v1(1296,1737) ; v1(1253,2369) 1264.92,2357.08 U2.93@1264.92,2297.74 ; v1(1510,1577) 1510,1605 1520.83,1615.83 U2.46@1520.83,1667.82 ; v1(1530,2369) 1540.51,2358.49 U2.79@1540.51,2297.74 ; v1(1576,1944) 1620,1944 1640.28,1923.72 U2.60@1678.31,1923.72 ; v1(1604,2049) 1630.85,2022.15 U2.65@1678.31,2022.15 ; U5.21@2385.67,1891.05 2441.05,1891.05 v1(2442,1892) ; U5.13@2385.67,2048.53 2439.47,2048.53 v1(2440,2048) ; U5.5@2385.67,2206.01 v1(2443,2206) ; v1(2541,2001) 2593,2001 2620.84,2028.84 U5.43@2671.1,2028.84 ; v1(2587,1956) 2587,1907 2602.95,1891.05 U5.36@2671.1,1891.05 U5.35@2671.1,1871.36 2727.64,1871.36 2734,1865 2734,1841 2724.99,1831.99 U5.33@2671.1,1831.99 ; v1(2601,2147) 2601.05,2146.95 U5.49@2671.1,2146.95 ; v1(2616,2226) 2616.31,2225.69 U5.53@2671.1,2225.69 ; v1(3025,2184) R33.2@3058.39,2184 ; v1(3209,2324) 3222.94,2310.06 P2.33@3264.41,2310.06 ; v1(3216,2179) 3222.73,2172.27 P2.26@3264.41,2172.27 3299.73,2172.27 3310,2162 3310,2023 3301.79,2014.79 P2.18@3264.41,2014.79 ; v1(3221,2212) 3221.36,2211.64 P2.28@3264.41,2211.64 ; P2.12@3264.41,1896.68 3346.32,1896.68 ; P2.15@3264.41,1955.73 3337.73,1955.73 ; P2.21@3264.41,2073.84 3306.84,2073.84 ; P2.24@3264.41,2132.9 3309.9,2132.9
  Top Layer w20: v1(1660,3368) C18.2@1660,3412 ; R7.1@1740,3467 v1(1792,3467) ; v1(1829,2956) 1830,2956 U3.4@1830,2880
  Bottom Layer w10: v1(902,2045) 912,2035 1010,2035 C1.1@1040,2005
  other v1: 316,549 367,550 693,596 911,596 806,597 909,658 2688,764 1562,766 1657,775 2689,812 1568,830 1659,835 2690,854 1663,909 970,933 1092,935 1035,965 970,989 1096,989 2266,1005 2316,1036 2357,1071 158,1172 212,1219 250,1253 73,1326 131,1369 85,1392 3420,1427 145,1444 3419,1475 3057,1679 3063,1713 2752,1748 2753,1779 562,2373 110,2548 196,2548 110,2610 194,2610 114,2663 2497,2998 2448,3001 2863,3038 2861,3089 1053,3338 703,3342 844,3342 606,3347
HSYNC: PR1.5 U2.51 | length 256
  Top Layer w10: U2.51@1678.31,1746.56 1730.83,1746.56 1820.32,1657.07 PR1.5@1897.24,1657.07
KEY0: K1.2 U2.90 | length 1084.1
  Top Layer w10: K1.2@1186.41,2774.6 cw(c1154.63,2742.81) 1199.58,2742.81 cw(c1244.54,2742.81) K1.2@1212.75,2774.6 ; K1.2@1186.41,2832.44 ccw(c1154.63,2864.23) 1199.58,2864.23 ccw(c1244.54,2864.23) K1.2@1212.75,2832.44 ; K1.2@1186.41,3089.56 cw(c1154.63,3057.77) 1199.58,3057.77 cw(c1244.54,3057.77) K1.2@1212.75,3089.56 ; K1.2@1199.58,3118.48 K1.2@1199.58,2803.52 1199.58,2740.42 1323.98,2616.02 U2.90@1323.98,2297.74
KEY1: K2.2 U2.91 | length 1360.4
  Top Layer w10: K2.2@866.41,2832.44 ccw(c834.63,2864.23) 879.58,2864.23 ccw(c924.54,2864.23) K2.2@892.75,2832.44 ; K2.2@866.41,3089.56 cw(c834.63,3057.77) 879.58,3057.77 cw(c924.54,3057.77) K2.2@892.75,3089.56 ; K2.2@866.99,2774.05 cw(c840.73,2745.42) 879.58,2745.42 ; K2.2@879.58,3118.48 K2.2@879.58,2803.52 879.58,2745.42 ; K2.2@892.17,2774.05 ccw(c918.43,2745.42) 879.58,2745.42 ; U2.91@1304.29,2297.74 1304.29,2590.71 1192,2703 922,2703 879.58,2745.42
KEY2: K3.2 U2.92 | length 1647.7
  Top Layer w10: K3.2@546.41,2832.44 ccw(c514.63,2864.23) 559.58,2864.23 ccw(c604.54,2864.23) K3.2@572.75,2832.44 ; K3.2@546.41,3089.56 cw(c514.63,3057.77) 559.58,3057.77 cw(c604.54,3057.77) K3.2@572.75,3089.56 ; K3.2@546.99,2774.05 cw(c520.73,2745.42) 559.58,2745.42 ; K3.2@559.58,3118.48 K3.2@559.58,2803.52 559.58,2745.42 ; K3.2@572.17,2774.05 ccw(c598.43,2745.42) 559.58,2745.42 ; U2.92@1284.61,2297.74 1284.61,2568.39 1180,2673 632,2673 559.58,2745.42
KEY3: K4.2 U2.95 | length 1936
  Top Layer w10: K4.2@226.41,2774.6 cw(c194.63,2742.81) 239.58,2742.81 cw(c284.54,2742.81) K4.2@252.75,2774.6 ; K4.2@226.41,2832.44 ccw(c194.63,2864.23) 239.58,2864.23 ccw(c284.54,2864.23) K4.2@252.75,2832.44 ; K4.2@226.41,3089.56 cw(c194.63,3057.77) 239.58,3057.77 cw(c284.54,3057.77) K4.2@252.75,3089.56 ; K4.2@239.58,3118.48 K4.2@239.58,2803.52 239.58,2713.42 310,2643 1155,2643 1225.55,2572.45 U2.95@1225.55,2297.74
L/R: P2.7 R20.1 R28.1 | length 458.3
  Top Layer w10: R28.1@3008,1730 3039,1730 3053,1744 3053,1797 3078,1822 3138,1822 3161.75,1798.25 P2.7@3264.41,1798.25 ; R28.1@3015.07,1722.93 cw(c3032.14,1705.86) 3032.14,1730 cw(c3032.14,1754.14) R28.1@3015.07,1737.07
  Top Layer w31.5: R20.1@3008,1645 R28.1@3008,1730
LED0: DS1.2 U2.86 | length 1080.9
  Top Layer w10: U2.86@1402.72,2297.74 1402.72,2788.72 1582,2968 DS1.2@1582,3228.5 ; DS1.2@1567.86,3211.79 cw(c1533.72,3177.65) 1582,3177.65 cw(c1630.28,3177.65) DS1.2@1596.14,3211.79
LED1: DS2.2 U2.87 | length 1055.9
  Top Layer w10: U2.87@1383.03,2297.74 1383.03,2839.03 1502,2958 DS2.2@1502,3228.5 ; DS2.2@1487.86,3211.79 cw(c1453.72,3177.65) 1502,3177.65 cw(c1550.28,3177.65) DS2.2@1516.14,3211.79
LED2: DS3.2 U2.88 | length 1030.9
  Top Layer w10: U2.88@1363.35,2297.74 1363.35,2879.35 1422,2938 DS3.2@1422,3228.5 ; DS3.2@1407.86,3211.79 cw(c1373.72,3177.65) 1422,3177.65 cw(c1470.28,3177.65) DS3.2@1436.14,3211.79
LED3: DS4.2 U2.89 | length 1030.7
  Top Layer w10: DS4.2@1327.86,3211.79 cw(c1289.7,3173.64) 1343.66,3173.64 ; DS4.2@1334.93,3218.87 cw(c1313.85,3197.78) 1343.66,3197.78 ; DS4.2@1342,3228.5 1343.66,3226.83 U2.89@1343.66,2297.74 ; 1343.66,3181.66 cw(c1386.27,3181.66) DS4.2@1356.14,3211.79
LED+: C41.1 D7.2 P2.39 P2.40 U6.5 | length 4278
  Top Layer w10: P2.40@3264.41,2447.86 P2.39@3264.41,2428.17 3314.83,2428.17 v1(3316,2427) ; 3296.73,2428.17 cw(c3296.73,2407.73) v1@3311.18,2422.18 ; 3302.38,2428.17 ccw(c3302.38,2440.62) v1@3311.18,2431.82
  Top Layer w20: v1@2892,1523 v1(2892,1524)
  Top Layer w31.5: C41.1@2014.5,1019.75 cw(c2014.5,985.34) 2038.83,1009.67 cw(c2063.16,1034) C41.1@2028.75,1034 ; C41.1@2014.5,1034 2150.58,897.92 D7.2@2150.58,894 ; U6.5@2062,1245.18 2062,1209 2046,1193 1839,1193 1809,1163 1809,856 1860,805 2061.58,805 D7.2@2150.58,894 ; 2097.41,951.09 cw(c2040.31,894) 2121.06,894 cw(c2049.77,894) 2100.18,843.59 cw(c2150.58,793.19) D7.2@2150.58,864.47 ; 2106.86,941.64 ccw(c2150.58,985.36) D7.2@2150.58,923.53 ; D7.2@2171.46,873.12 cw(c2221.87,822.71) 2221.87,894 cw(c2221.87,965.29) D7.2@2171.46,914.88 ; v1@2893,1523 2893,1281 2654,1042 2421,1042 2273,894 D7.2@2150.58,894
  Bottom Layer w20: v1(2892,1524) 3193,1524 3347,1678 3347,1993 3407,2053 3407,2389 3369,2427 v1(3316,2427) ; v1@3350,2424.19 cw(c3350,2371.53) 3387.23,2408.77 ; v1@3350.51,2424.26 cw(c3358.64,2396.64) 3379,2417
  other v1: 2929,1524 3350,2426
LED-: P2.35 P2.36 R38.2 R39.1 R40.1 R41.1 | length 2110.3
  Top Layer w10: P2.36@3264.41,2369.12 P2.35@3264.41,2349.43 3315.43,2349.43 v1(3317,2351) ; 3296.77,2349.43 ccw(c3296.77,2371.23) v1@3312.18,2355.82 ; 3304.34,2349.43 cw(c3304.34,2338.34) v1@3312.18,2346.18
  Top Layer w20: v1@2811,1640 v1(2811,1641)
  Top Layer w31.5: R38.2@2337,1189 R39.1@2432,1189 R40.1@2527,1189 R41.1@2622,1189 2683,1189 2810,1316 v1@2810,1640
  Bottom Layer w20: v1(2811,1641) 3223,1641 3317,1735 v1(3317,2351)
  other v1: 2852,1641 3317,2315
NetC9_2: C9.2 C10.2 JZ1.4 R4.1 | length 555.6
  Top Layer w20: R4.1@706,791 901,791 C10.2@906,796 1021,796 JZ1.4@1026,801 ; C9.2@795.39,780.39 ccw(c769.79,754.79) 769.79,791 ccw(c769.79,827.21) C9.2@795.39,801.61 ; C9.2@816.61,780.39 cw(c842.21,754.79) 842.21,791 cw(c842.21,827.21) C9.2@816.61,801.61 ; 881.86,791 ccw(c881.86,820.14) C10.2@902.46,799.54 ; JZ1.4@1008.32,778.32 ccw(c965.64,735.64) 965.64,796 ccw(c965.64,856.36) JZ1.4@1008.32,813.68
NetC23_1: C23.1 D1.3 | length 698.4
  Top Layer w31.5: D1.3@2544,2824.18 2595.18,2824.18 2647,2876 2927,2876 3004,2953 C23.1@3004,3138
NetC24_2: C24.2 L1.1 U5.34 | length 379.4
  Top Layer w10: v1(2589,1820) 2620.68,1851.68 U5.34@2671.1,1851.68 ; v1@2589,1826.81 ccw(c2589,1843.25) 2600.63,1831.63 ccw(c2612.25,1820) v1@2595.81,1820
  Bottom Layer w10: C24.2@2581.31,1848.66 cw(c2562.76,1830.11) v1@2589,1830.11 ; v1@2584.18,1824.82 ccw(c2572.56,1836.44) 2589,1836.44 ccw(c2605.44,1836.44) v1@2593.82,1824.82 ; v1(2589,1820) 2589,1855.12 C24.2@2588.39,1855.73 L1.1@2671.1,1855.73 ; 2589,1833.07 cw(c2611.05,1833.07) 2595.46,1848.66 cw(c2612.53,1831.59) 2612.53,1855.73 cw(c2612.53,1879.87) C24.2@2595.46,1862.8 ; L1.1@2664.03,1848.66 ccw(c2646.96,1831.59) 2646.96,1855.73 ccw(c2646.96,1879.87) L1.1@2664.03,1862.8
NetC25_1: C25.1 D1.2 R11.2 | length 297
  Top Layer w31.5: C25.1@2536.5,2613 2581.4,2657.9 D1.2@2581.4,2721.82 2652.82,2721.82 R11.2@2684,2753 ; C25.1@2536.5,2627.25 ccw(c2536.5,2661.66) 2560.83,2637.33 ccw(c2585.16,2613) C25.1@2550.75,2613
NetC27_2: C27.2 L2.1 U5.44 | length 405.6
  Top Layer w10: v1(2548,2049) 2548.47,2048.53 U5.44@2671.1,2048.53 ; v1@2552.82,2044.18 cw(c2563.3,2033.7) 2563.3,2048.53 ; v1@2552.82,2053.82 ccw(c2565.58,2066.58) 2565.58,2048.53
  Bottom Layer w10: v1(2548,2049) 2583.39,2049 C27.2@2588.39,2054 L2.1@2668.39,2054 ; v1@2552.17,2049 ccw(c2552.17,2090.21) C27.2@2581.31,2061.07 ; v1@2552.82,2044.18 cw(c2564.44,2032.56) 2564.44,2049 cw(c2564.44,2065.44) v1@2552.82,2053.82 ; C27.2@2595.46,2046.93 cw(c2612.53,2029.86) 2612.53,2054 cw(c2612.53,2078.14) C27.2@2595.46,2061.07 ; L2.1@2661.31,2046.93 ccw(c2644.24,2029.86) 2644.24,2054 ccw(c2644.24,2078.14) L2.1@2661.31,2061.07
NetC30_2: C30.2 D4.3 | length 755.2
  Top Layer w31.5: D4.3@2384,2824.18 2484.82,2925 2860,2925 2919,2984 C30.2@2919,3138
NetC31_2: C31.2 R16.2 R24.2 U4.4 | length 468.5
  Top Layer w31.5: R16.2@3041,1158 C31.2@3141,1158 3128.4,1145.4 3128.4,1111 ; U4.4@3128.4,1009.18 3128.4,1111 ; 3128.4,1129.39 cw(c3169.61,1129.39) C31.2@3140.47,1158.53 ; R24.2@3291,1158 3244,1111 3128.4,1111
NetC33_1: C33.1 D1.1 D4.2 | length 271.3
  Top Layer w31.5: C33.1@2401.42,2623.08 ccw(c2377.09,2647.41) 2411.5,2647.41 ccw(c2445.91,2647.41) C33.1@2421.58,2623.08 ; C33.1@2411.5,2613 2411.5,2711.92 D4.2@2421.4,2721.82 D1.1@2506.6,2721.82 ; 2411.5,2697.58 cw(c2435.8,2697.58) D4.2@2418.62,2714.76
NetC36_2: C36.2 D5.3 | length 179.4
  Top Layer w31.5: D5.3@2689,3224.18 2725.82,3224.18 2765,3185 2765,3153 2780,3138 C36.2@2814,3138
NetC37_2: C37.2 D5.1 R32.2 | length 260.1
  Top Layer w31.5: R32.2@2569,3133 2640.42,3133 D5.1@2651.6,3121.82 C37.2@2651.6,3003.1 ; C37.2@2631.42,3003.08 ccw(c2582.71,3051.79) 2651.6,3051.79
NetC48_2: C48.2 R44.1 R45.2 | length 396
  Top Layer w31.5: R44.1@2241.25,1189 cw(c2297.39,1189) 2257.69,1228.69 ; R44.1@2241.45,1188.5 cw(c2254.54,1200.46) 2242,1213 ; R44.1@2242,1189 2242,1213 ; 2328.43,1299.43 ccw(c2293.86,1334) R45.2@2342.75,1334 ; C48.2@2342,1434 R45.2@2342,1334 2342,1313 2242,1213
NetD7_1: D7.1 L4.2 U6.1 | length 656.5
  Top Layer w31.5: L4.2@1871.92,1116.42 cw(c1847.59,1092.09) 1882,1092.09 cw(c1916.41,1092.09) 1892.08,1116.42 cw(c1955.8,1052.7) 1955.8,1142.82 ; D7.1@1943.89,894 ccw(c1872.6,894) 1923.01,944.41 ccw(c1973.42,994.81) D7.1@1973.42,923.53 ; D7.1@1973.42,894 1882,985.42 L4.2@1882,1126.5 1898.32,1142.82 U6.1@2024.6,1142.82
NetDC_IN1_1: DC_IN1.1 S1.2 | length 1101.2
  Top Layer w39.37: DC_IN1.1@1557.21,547.68 ccw(c1522.53,513) 1522.53,562.05 ccw(c1522.53,611.09) DC_IN1.1@1557.21,576.41 ; DC_IN1.1@1621.57,562.05 1495.05,562.05 1429,496 1429,233 1502,160 1509,160 S1.2@1940,160
NetDS1_1: DS1.1 R6.2 | length 210.3
  Top Layer w10: DS1.1@1567.86,3332.21 ccw(c1533.72,3366.35) 1582,3366.35 ccw(c1630.28,3366.35) DS1.1@1596.14,3332.21 ; R6.2@1574.93,3404.93 cw(c1557.86,3387.86) 1582,3387.86 cw(c1606.14,3387.86) R6.2@1589.07,3404.93 ; DS1.1@1582,3315.5 R6.2@1582,3412
NetDS2_1: DS2.1 R8.2 | length 210.3
  Top Layer w10: DS2.1@1487.86,3332.21 ccw(c1453.72,3366.35) 1502,3366.35 ccw(c1550.28,3366.35) DS2.1@1516.14,3332.21 ; R8.2@1494.93,3404.93 cw(c1477.86,3387.86) 1502,3387.86 cw(c1526.14,3387.86) R8.2@1509.07,3404.93 ; DS2.1@1502,3315.5 R8.2@1502,3412
NetDS3_1: DS3.1 R9.2 | length 210.3
  Top Layer w10: DS3.1@1407.86,3332.21 ccw(c1373.72,3366.35) 1422,3366.35 ccw(c1470.28,3366.35) DS3.1@1436.14,3332.21 ; R9.2@1414.93,3404.93 cw(c1397.86,3387.86) 1422,3387.86 cw(c1446.14,3387.86) R9.2@1429.07,3404.93 ; DS3.1@1422,3315.5 R9.2@1422,3412
NetDS4_1: DS4.1 R10.2 | length 210.3
  Top Layer w10: DS4.1@1327.86,3332.21 ccw(c1293.72,3366.35) 1342,3366.35 ccw(c1390.28,3366.35) DS4.1@1356.14,3332.21 ; R10.2@1334.93,3404.93 cw(c1317.86,3387.86) 1342,3387.86 cw(c1366.14,3387.86) R10.2@1349.07,3404.93 ; DS4.1@1342,3315.5 R10.2@1342,3412
NetDS5_1: DS5.1 R37.2 | length 96.5
  Top Layer w31.5: DS5.1@2765,145.5 R37.2@2765,242
NetF1_1: F1.1 S1.3 | length 502
  Top Layer w39.37: S1.3@1940,60 2014,60 2040,86 2040,282 1950,372 F1.1@1950,440
NetJZ1_3: JZ1.3 R5.2 | length 342.5
  Top Layer w10: JZ1.3@1204.79,827.21 ccw(c1153.57,878.43) 1226,878.43 ccw(c1298.43,878.43) JZ1.3@1247.21,827.21 ; JZ1.3@1211.86,820.14 ccw(c1177.72,854.28) 1226,854.28 ccw(c1274.28,854.28) JZ1.3@1240.14,820.14 ; R5.2@1218.93,908.93 cw(c1201.86,891.86) 1226,891.86 cw(c1250.14,891.86) R5.2@1233.07,908.93 ; JZ1.3@1226,801 R5.2@1226,916
NetPR1_1: PR1.1 U5.30 | length 798.1
  Top Layer w10: PR1.1@1960.12,1562.58 2306.97,1562.58 2517.32,1772.94 U5.30@2671.1,1772.94
NetPR1_2: PR1.2 U5.31 | length 793.2
  Top Layer w10: PR1.2@1960.12,1594.08 2298.46,1594.08 2497.01,1792.62 U5.31@2671.1,1792.62
NetPR1_3: PR1.3 U5.28 | length 478.4
  Top Layer w10: PR1.3@1960.12,1625.57 2164.96,1625.57 2292.64,1753.25 U5.28@2385.67,1753.25
NetPR1_4: PR1.4 U5.27 | length 473.5
  Top Layer w10: PR1.4@1960.12,1657.07 2166.46,1657.07 2282.32,1772.94 U5.27@2385.67,1772.94
NetQ1_1: Q1.1 R15.2 R18.1 | length 267.9
  Top Layer w31.5: R15.2@3090.93,1402.74 cw(c3094.37,1367.37) 3119.5,1392.5 ; R15.2@3091,1402 3110,1402 3141.18,1370.82 Q1.1@3193.6,1370.82 R18.1@3193.6,1284.4 ; R15.2@3091,1402.75 cw(c3091,1358.68) 3122.16,1389.84
NetR17_1: R17.1 R19.2 R25.2 | length 302.7
  Top Layer w31.5: R25.2@3311,1018 R19.2@3311,918 3331,898 R17.1@3331,813 ; R19.2@3311.27,918.7 cw(c3299.85,889.72) 3331,889.72 ; R19.2@3311.53,918.53 cw(c3264.52,871.52) 3331,871.52
NetR18_2: R18.2 R26.1 | length 263.5
  Top Layer w31.5: R18.2@3251,1282 3366,1282 R26.1@3471,1387
NetR19_1: R19.1 U4.3 | length 160.8
  Top Layer w31.5: U4.3@3128.4,906.82 3244.82,906.82 R19.1@3256,918 ; 3230.81,906.82 ccw(c3230.81,943.19) R19.1@3256.53,917.47
NetR34_2: R34.2 R42.2 U6.4 | length 273.7
  Top Layer w31.5: R34.2@2082.28,1334.69 cw(c2072.14,1309.39) 2099.4,1309.39 ; R34.2@2082.53,1334.53 cw(c2041.79,1293.79) 2099.4,1293.79 ; U6.4@2099.4,1245.18 2099.4,1316.6 R34.2@2082,1334 R42.2@2182,1334